# EAGLE board BOB_O1000-W42Y2010 (EAGLE 5.10)
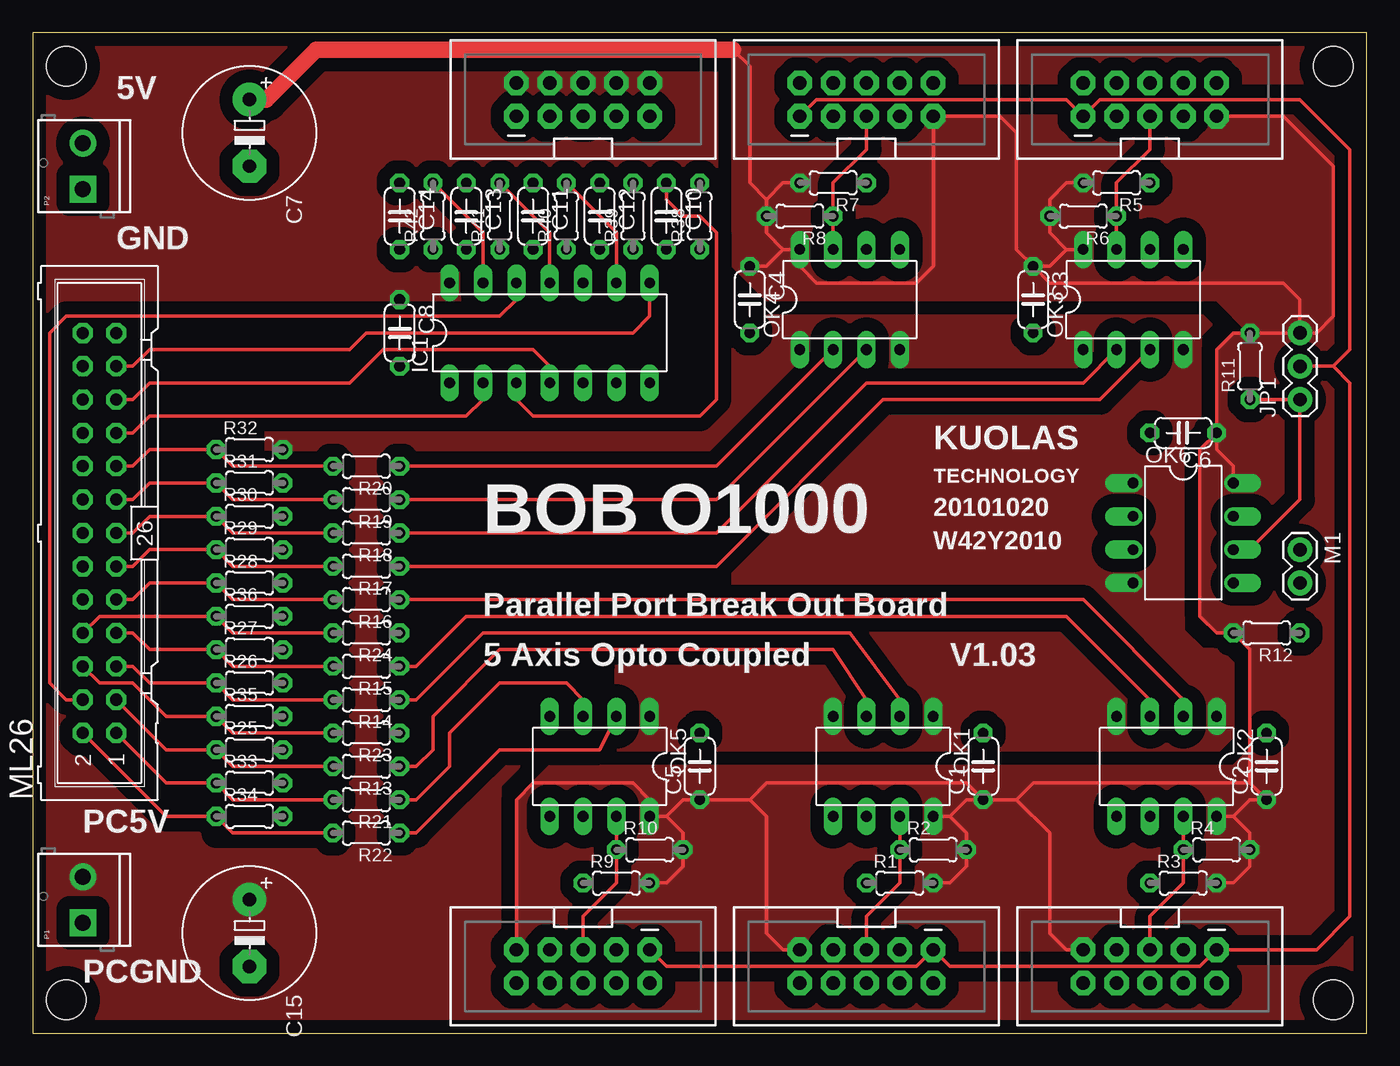
[diagram p0: board, top side]
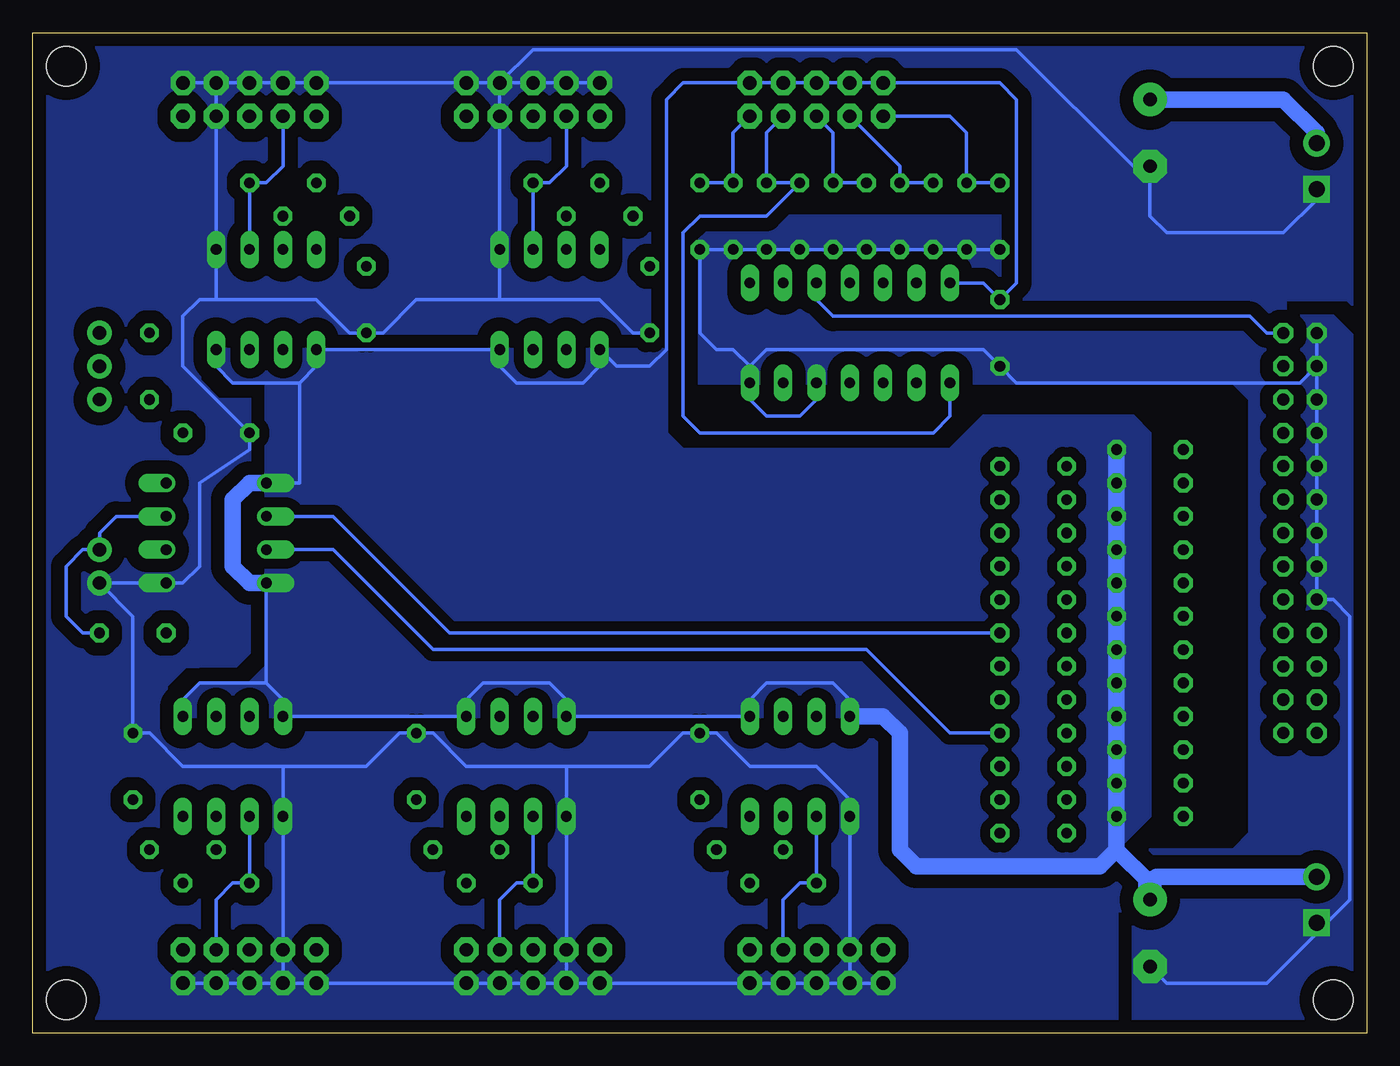
[diagram p1: board, bottom side, seen from below]

Size 101.6 x 76.2 mm. Coordinates in mm from the lower left corner, seen from the top.
Outline: 0,0 101.6,0 101.6,76.2 0,76.19 0,0
Copper layers (1*16): Top 0.035mm / dielectric 1.5mm / Bottom 0.035mm
Design rules "SparkFun": minimum track width 8mil, minimum drill 20mil, track to track 8mil, track to pad 8mil, pad to pad 8mil, via to via 8mil, smd to smd 8mil, copper to edge 10mil, drill to drill 8mil, minimum pad ring 12mil, minimum via ring 10mil, stop-mask expansion 4mil, vias tented up to drill 25mil, thermal gap 10mil
Holes 3.05 mm at 2.54,73.66 99.06,73.66 99.06,2.54 2.54,2.54
tRestrict: area 14,15.2 to 19.1,43.2; area 15.2,44.5 to 16.5,45.7; area 33,47 to 38.1,48.3; area 33,20.3 to 40.6,26.7; area 41.9,21.6 to 43.2,27.9; area 29.2,33 to 52.1,35.6

## Footprints (pad centres in the part's own frame; a part is rotated, then mirrored left to right if it is on the bottom)
C050-024X044 = drill 0.813 octagon: 1 -2.54,0; 2 2.54,0
E5-10,5 = drill 1.016 pad 2.54 round: + -2.54,0 | drill 1.016 pad 2.54 octagon: - 2.54,0
2X5-SHROUDED = drill 1.016 pad 1.88 octagon: 1 -1.27,5.08; 2 1.27,5.08; 3 -1.27,2.54; 4 1.27,2.54; 5 -1.27,0; 6 1.27,0; 7 -1.27,-2.54; 8 1.27,-2.54; 9 -1.27,-5.08; 10 1.27,-5.08
DIL14 = drill 0.813 long: 1 -7.62,-3.81; 2 -5.08,-3.81; 3 -2.54,-3.81; 4 0,-3.81; 5 2.54,-3.81; 6 5.08,-3.81; 7 7.62,-3.81; 8 7.62,3.81; 9 5.08,3.81; 10 2.54,3.81; 11 0,3.81; 12 -2.54,3.81; 13 -5.08,3.81; 14 -7.62,3.81
1X03 = drill 1.016 pad 1.88 round: 1 -2.54,0; 2 0,0; 3 2.54,0
1X02 = drill 1.016 pad 1.88 round: 1 -1.27,0; 2 1.27,0
ML26 = drill 0.914 octagon: 1 -15.24,-1.27; 2 -15.24,1.27; 3 -12.7,-1.27; 4 -12.7,1.27; 5 -10.16,-1.27; 6 -10.16,1.27; 7 -7.62,-1.27; 8 -7.62,1.27; 9 -5.08,-1.27; 10 -5.08,1.27; 11 -2.54,-1.27; 12 -2.54,1.27; 13 0,-1.27; 14 0,1.27; 15 2.54,-1.27; 16 2.54,1.27; 17 5.08,-1.27; 18 5.08,1.27; 19 7.62,-1.27; 20 7.62,1.27; 21 10.16,-1.27; 22 10.16,1.27; 23 12.7,-1.27; 24 12.7,1.27; 25 15.24,-1.27; 26 15.24,1.27
DIL08 = drill 0.813 long: 1 -3.81,-3.81; 2 -1.27,-3.81; 3 1.27,-3.81; 4 3.81,-3.81; 5 3.81,3.81; 6 1.27,3.81; 7 -1.27,3.81; 8 -3.81,3.81
DIL08' = drill 0.813 offset: 1 -3.81,-3.81; 2 -1.27,-3.81; 3 1.27,-3.81; 4 3.81,-3.81; 5 3.81,3.81; 6 1.27,3.81; 7 -1.27,3.81; 8 -3.81,3.81
SCREWTERMINAL-3.5MM-2 = drill 1.2 pad 2.032 square: 1 -1.753,0 | drill 1.2 pad 2.032 round: 2 1.747,0
0204/5 = drill 0.813 octagon: 1 -2.54,0; 2 2.54,0

## Placement (x,y rotation side)
C1  0.1µF  [C050-024X044]  72.39,20.32 90 top
C2  0.1µF  [C050-024X044]  93.98,20.32 90 top
C3  0.1µF  [C050-024X044]  76.2,55.88 270 top
C4  0.1µF  [C050-024X044]  54.61,55.88 270 top
C5  0.1µF  [C050-024X044]  50.8,20.32 90 top
C6  0.1µF  [C050-024X044]  87.63,45.72 180 top
C7  100µF  [E5-10,5]  16.51,68.58 270 top
C8  0.1µF  [C050-024X044]  27.94,53.34 270 top
C10  0.1µF  [C050-024X044]  48.26,62.23 270 top
C11  0.1µF  [C050-024X044]  38.1,62.23 270 top
C12  0.1µF  [C050-024X044]  43.18,62.23 270 top
C13  0.1µF  [C050-024X044]  33.02,62.23 270 top
C14  0.1µF  [C050-024X044]  27.94,62.23 270 top
C15  100µF  [E5-10,5]  16.51,7.62 270 top
CN1  X-AXIS  [2X5-SHROUDED]  63.5,5.08 270 top
CN2  Y-AXIS  [2X5-SHROUDED]  85.09,5.08 270 top
CN3  Z-AXIS  [2X5-SHROUDED]  85.09,71.12 90 top
CN4  A-AXIS  [2X5-SHROUDED]  63.5,71.12 90 top
CN5  B-AXIS  [2X5-SHROUDED]  41.91,5.08 270 top
CN6  HOME  [2X5-SHROUDED]  41.91,71.12 90 top
IC1  74HC14N  [DIL14]  39.37,53.34 0 top
JP1  J1  [1X03]  96.52,50.8 90 top
M1  PWM  [1X02]  96.52,35.56 270 top
ML26  IDC26M  [ML26]  5.08,38.1 90 top
OK1  HCPL2630  [DIL08]  64.77,20.32 180 top
OK2  HCPL2630  [DIL08]  86.36,20.32 180 top
OK3  HCPL2630  [DIL08]  83.82,55.88 0 top
OK4  HCPL2630  [DIL08]  62.23,55.88 0 top
OK5  HCPL2630  [DIL08]  43.18,20.32 180 top
OK6  HCPL2630  [DIL08']  87.63,38.1 270 top
P1  PC5V  [SCREWTERMINAL-3.5MM-2]  3.81,10.16 90 top
P2  EXT5V  [SCREWTERMINAL-3.5MM-2]  3.81,66.04 90 top
R1  330R  [0204/5]  66.04,11.43 0 top
R2  330R  [0204/5]  68.58,13.97 0 top
R3  330R  [0204/5]  87.63,11.43 0 top
R4  330R  [0204/5]  90.17,13.97 0 top
R5  330R  [0204/5]  82.55,64.77 180 top
R6  330R  [0204/5]  80.01,62.23 180 top
R7  330R  [0204/5]  60.96,64.77 180 top
R8  330R  [0204/5]  58.42,62.23 180 top
R9  330R  [0204/5]  44.45,11.43 0 top
R10  330R  [0204/5]  46.99,13.97 0 top
R11  330R  [0204/5]  92.71,50.8 90 top
R12  330R  [0204/5]  93.98,30.48 180 top
R13  470R  [0204/5]  25.4,20.32 180 top
R14  470R  [0204/5]  25.4,25.4 180 top
R15  470R  [0204/5]  25.4,27.94 180 top
R16  470R  [0204/5]  25.4,33.02 180 top
R17  470R  [0204/5]  25.4,35.56 180 top
R18  470R  [0204/5]  25.4,38.1 180 top
R19  470R  [0204/5]  25.4,40.64 180 top
R20  470R  [0204/5]  25.4,43.18 180 top
R21  470R  [0204/5]  25.4,17.78 180 top
R22  470R  [0204/5]  25.4,15.24 180 top
R23  470R  [0204/5]  25.4,22.86 180 top
R24  470R  [0204/5]  25.4,30.48 180 top
R25  2K2  [0204/5]  16.51,21.59 0 top
R26  2K2  [0204/5]  16.51,26.67 0 top
R27  2K2  [0204/5]  16.51,29.21 0 top
R28  2K2  [0204/5]  16.51,34.29 0 top
R29  2K2  [0204/5]  16.51,36.83 0 top
R30  2K2  [0204/5]  16.51,39.37 0 top
R31  2K2  [0204/5]  16.51,41.91 0 top
R32  2K2  [0204/5]  16.51,44.45 0 top
R33  2K2  [0204/5]  16.51,19.05 0 top
R34  2K2  [0204/5]  16.51,16.51 0 top
R35  2K2  [0204/5]  16.51,24.13 0 top
R36  2K2  [0204/5]  16.51,31.75 0 top
R38  10K  [0204/5]  50.8,62.23 90 top
R39  10K  [0204/5]  45.72,62.23 90 top
R40  10K  [0204/5]  40.64,62.23 90 top
R41  10K  [0204/5]  35.56,62.23 90 top
R42  10K  [0204/5]  30.48,62.23 90 top
U$23  CC-NC-BCNIX  [CC-NC-B_NIX]  0,0 0 top

## Library data of the parts
C1-C8 C10-C15 R1-R36 R38-R42 = rcl-2
CN1-CN6 JP1 M1 P1 P2 = SparkFun
IC1 = 74xx-eu
ML26 = con-harting-ml
OK1-OK5 = optocoupler-2
OK6 = optocoupler
U$23 = cc-by-nc-sa

## Nets
5V: C1.1 C2.1 C3.1 C4.1 C5.1 C6.1 C7.+ CN1.9 CN2.9 CN3.9 CN4.9 CN5.9 JP1.3 OK1.8 OK2.8 OK3.8 OK4.8 OK5.8 OK6.8 P2.2 R1.2 R2.2 R3.2 R4.2 R5.2 R6.2 R7.2 R8.2 R9.2 R10.2 R11.2 R12.2
A-HOME: C12.1 CN6.7 IC1.1 R39.2
B-HOME: C10.1 CN6.9 IC1.3 R38.2
CR0: ML26.1 R21.2 R33.1
CR1: ML26.2 R22.2 R34.1
CR2: ML26.6 R23.2 R35.1
CR3: ML26.8 R24.2 R36.1
DIR_A: CN4.3 OK4.6 R7.1
DIR_B: CN5.3 OK5.6 R9.1
DIR_X: CN1.3 OK1.6 R1.1
DIR_Y: CN2.3 OK2.6 R3.1
DIR_Z: CN3.3 OK3.6 R5.1
DR0: ML26.3 R13.2 R25.1
DR1: ML26.5 R14.2 R26.1
DR2: ML26.7 R15.2 R27.1
DR3: ML26.9 R16.2 R28.1
DR4: ML26.11 R17.2 R29.1
DR5: ML26.13 R18.2 R30.1
DR6: ML26.15 R19.2 R31.1
DR7: ML26.17 R20.2 R32.1
ENABLE: CN1.1 CN2.1 CN3.1 CN4.1 CN5.1 JP1.2
GND: C1.2 C2.2 C3.2 C4.2 C5.2 C6.2 C7.- CN1.2 CN1.4 CN1.6 CN1.7 CN1.8 CN1.10 CN2.2 CN2.4 CN2.6 CN2.7 CN2.8 CN2.10 CN3.2 CN3.4 CN3.6 CN3.7 CN3.8 CN3.10 CN4.2 CN4.4 CN4.6 CN4.7 CN4.8 CN4.10 CN5.2 CN5.4 CN5.6 CN5.7 CN5.8 CN5.10 M1.2 OK1.5 OK2.5 OK3.5 OK4.5 OK5.5 OK6.5 P2.1
N$1: OK6.2 R24.1
N$2: JP1.1 OK6.6 R11.1
N$3: M1.1 OK6.7 R12.1
N$4: OK6.3 R23.1
N$5: OK1.2 R14.1
N$6: OK1.3 R13.1
N$17: OK2.3 R15.1
N$18: OK2.2 R16.1
N$19: OK3.3 R17.1
N$20: OK3.2 R18.1
N$21: OK4.3 R19.1
N$22: OK4.2 R20.1
N$23: OK5.3 R21.1
N$24: OK5.2 R22.1
PC5V: C8.1 C15.+ CN6.2 CN6.4 CN6.6 CN6.8 CN6.10 IC1.14 OK1.1 OK1.4 OK2.1 OK2.4 OK3.1 OK3.4 OK4.1 OK4.4 OK5.1 OK5.4 OK6.1 OK6.4 P1.2 R25.2 R26.2 R27.2 R28.2 R29.2 R30.2 R31.2 R32.2 R33.2 R34.2 R35.2 R36.2
PCGND: C8.2 C10.2 C11.2 C12.2 C13.2 C14.2 C15.- IC1.5 IC1.7 ML26.10 ML26.12 ML26.14 ML26.16 ML26.18 ML26.20 ML26.22 ML26.24 ML26.26 P1.1 R38.1 R39.1 R40.1 R41.1 R42.1
SR3: IC1.12 ML26.4
SR4: IC1.10 ML26.25
SR5: IC1.8 ML26.23
SR6: IC1.2 ML26.19
SR7: IC1.4 ML26.21
STEP_A: CN4.5 OK4.7 R8.1
STEP_B: CN5.5 OK5.7 R10.1
STEP_X: CN1.5 OK1.7 R2.1
STEP_Y: CN2.5 OK2.7 R4.1
STEP_Z: CN3.5 OK3.7 R6.1
UNUSED: IC1.6
X-HOME: C14.1 CN6.1 IC1.13 R42.2
Y-HOME: C13.1 CN6.3 IC1.11 R41.2
Z-HOME: C11.1 CN6.5 IC1.9 R40.2

## Tracks (layer width: path | path; a pad name or v marks a point on that pad's centre or on a via)
5V
  Top 0.254: 48.26,16.51 OK5.8 46.99,17.78 45.72,19.05 38.1,19.05 36.83,17.78 CN5.9 | 48.26,16.51 49.53,15.24 R10.2 49.53,12.7 48.26,11.43 R9.2 | 48.26,16.51 49.53,17.78 C5.1 54.61,17.78 | CN1.9 57.15,6.35 55.88,7.62 55.88,16.51 54.61,17.78 | CN2.9 78.74,6.35 77.47,7.62 77.47,15.24 74.93,17.78 | C1.1 74.93,17.78 | 69.85,16.51 OK1.8 | 69.85,16.51 71.12,15.24 R2.2 71.12,12.7 69.85,11.43 R1.2 | C1.1 71.12,17.78 69.85,16.51 | 54.61,17.78 55.88,19.05 71.12,19.05 C1.1 | 74.93,17.78 76.2,19.05 92.71,19.05 | 92.71,19.05 C2.1 92.71,17.78 91.44,16.51 | R3.2 91.44,11.43 92.71,12.7 R4.2 92.71,15.24 91.44,16.51 | 91.44,16.51 OK2.8 | C6.1 90.17,44.45 91.44,43.18 OK6.8 | C6.1 88.9,44.45 88.9,31.75 90.17,30.48 R12.2 92.71,29.21 92.71,19.05 | C6.1 90.17,52.07 91.44,53.34 R11.2 JP1.3 | R5.2 78.74,64.77 77.47,63.5 R6.2 77.47,60.96 78.74,59.69 | 78.74,59.69 OK3.8 | 78.74,59.69 77.47,58.42 C3.1 | C3.1 77.47,57.15 95.25,57.15 96.52,55.88 JP1.3 | 57.15,59.69 OK4.8 58.42,58.42 59.69,57.15 67.31,57.15 68.58,58.42 CN4.9 73.66,69.85 74.93,68.58 74.93,59.69 C3.1 | 57.15,59.69 55.88,60.96 R8.2 55.88,63.5 | 55.88,63.5 57.15,64.77 R7.2 | C4.1 55.88,58.42 57.15,59.69 | CN3.9 95.25,69.85 99.06,66.04 99.06,54.61 97.79,53.34 JP1.3 | 53.34,74.93 54.61,73.66 54.61,64.77 55.88,63.5
  Top 1.27: C7.+ 17.78,71.12 21.59,74.93 53.34,74.93
  Bottom 1.27: C7.+ 6.35,71.12 3.81,68.58 P2.2
  pour Top (isolate 1.016, no thermals): 36.83,5.08 101.6,5.08 101.6,21.59 92.71,21.59 91.44,20.32 39.37,20.32 36.83,17.78
  pour Top (isolate 1.016, no thermals): 92.71,19.05 101.6,19.05 101.6,53.34 92.71,53.34 91.44,53.34 90.17,52.07 90.17,45.72 88.9,44.45 88.9,31.75 90.17,30.48 91.44,30.48 92.71,29.21
  pour Top (isolate 1.016, no thermals): 101.6,76.2 53.34,76.2 53.34,58.42 55.88,55.88 90.17,55.88 92.71,53.34 101.6,53.34
A-HOME
  Bottom 0.254: CN6.7 45.72,68.58 R39.2 C12.1 45.72,62.23 50.8,62.23 52.07,60.96 52.07,46.99 50.8,45.72 33.02,45.72 31.75,46.99 IC1.1
B-HOME
  Top 0.254: C10.1 48.26,63.5 49.53,62.23 50.8,62.23 52.07,60.96 52.07,48.26 50.8,46.99 38.1,46.99 36.83,48.26 IC1.3
  Bottom 0.254: R38.2 C10.1 48.26,68.58 CN6.9
CR0
  Top 0.254: R21.2 15.24,17.78 R33.1 10.16,19.05 ML26.1
CR1
  Top 0.254: R22.2 15.24,15.24 R34.1 10.16,16.51 ML26.2
CR2
  Top 0.254: R23.2 15.24,22.86 R35.1 10.16,24.13 7.62,26.67 5.08,26.67 ML26.6
CR3
  Top 0.254: R24.2 15.24,30.48 R36.1 5.08,31.75 ML26.8
DIR_A
  Bottom 0.254: OK4.6 R7.1 62.23,64.77 60.96,66.04 CN4.3
DIR_B
  Bottom 0.254: CN5.3 44.45,10.16 43.18,11.43 R9.1 OK5.6
DIR_X
  Bottom 0.254: CN1.3 66.04,10.16 64.77,11.43 R1.1 OK1.6
DIR_Y
  Bottom 0.254: OK2.6 R3.1 86.36,11.43 87.63,10.16 CN2.3
DIR_Z
  Bottom 0.254: OK3.6 R5.1 83.82,64.77 82.55,66.04 CN3.3
DR0
  Top 0.254: R13.2 15.24,20.32 R25.1 10.16,21.59 ML26.3
DR1
  Top 0.254: R14.2 15.24,25.4 R26.1 8.89,26.67 7.62,27.94 ML26.5
DR2
  Top 0.254: R15.2 15.24,27.94 R27.1 8.89,29.21 7.62,30.48 ML26.7
DR3
  Top 0.254: R16.2 15.24,33.02 R28.1 8.89,34.29 7.62,33.02 ML26.9
DR4
  Top 0.254: R17.2 15.24,35.56 R29.1 8.89,36.83 7.62,35.56 ML26.11
DR5
  Top 0.254: R18.2 15.24,38.1 R30.1 8.89,39.37 7.62,38.1 ML26.13
DR6
  Top 0.254: R19.2 15.24,40.64 R31.1 8.89,41.91 7.62,40.64 ML26.15
DR7
  Top 0.254: R20.2 15.24,43.18 R32.1 8.89,44.45 7.62,43.18 ML26.17
ENABLE
  Top 0.254: CN5.1 48.26,5.08 67.31,5.08 CN1.1 69.85,5.08 88.9,5.08 CN2.1 97.79,6.35 100.33,8.89 100.33,49.53 99.06,50.8 | 99.06,50.8 JP1.2 | 99.06,50.8 100.33,52.07 100.33,67.31 96.52,71.12 81.28,71.12 CN3.1 78.74,71.12 59.69,71.12 CN4.1
GND
  Bottom 0.254: CN5.10 CN5.8 | CN5.8 CN5.7 OK5.5 39.37,17.78 41.91,20.32 46.99,20.32 49.53,22.86 C5.2 52.07,22.86 54.61,20.32 60.96,20.32 | CN5.8 CN5.6 CN5.4 CN5.2 CN1.10 CN1.8 | CN1.8 CN1.6 CN1.4 CN1.2 CN2.10 CN2.8 | CN2.8 CN2.6 CN2.4 CN2.2 | CN1.8 CN1.7 OK1.5 60.96,20.32 | CN2.8 CN2.7 OK2.5 82.55,20.32 | 60.96,20.32 68.58,20.32 71.12,22.86 C1.2 73.66,22.86 76.2,20.32 82.55,20.32 | 82.55,20.32 90.17,20.32 92.71,22.86 C2.2 93.98,31.75 M1.2 OK6.5 90.17,34.29 88.9,35.56 88.9,41.91 85.09,44.45 C6.2 90.17,50.8 90.17,54.61 88.9,55.88 87.63,55.88 | 87.63,55.88 80.01,55.88 77.47,53.34 C3.2 74.93,53.34 72.39,55.88 66.04,55.88 | CN3.8 CN3.10 | CN3.8 CN3.6 CN3.4 CN3.2 CN4.10 CN4.8 | CN4.8 CN4.6 CN4.4 CN4.2 | CN4.8 CN4.7 OK4.5 66.04,55.88 | CN3.8 CN3.7 OK3.5 87.63,55.88 | 66.04,55.88 58.42,55.88 55.88,53.34 C4.2 | P2.1 3.81,63.5 6.35,60.96 15.24,60.96 16.51,62.23 C7.- 17.78,66.04 26.67,74.93 63.5,74.93 CN4.8
  pour Bottom (isolate 1.016, rank 2, no thermals): 0,0 101.6,0 101.6,76.2 0,76.2
N$1
  Bottom 0.254: R24.1 69.85,30.48 78.74,39.37 OK6.2
N$2
  Top 0.254: OK6.6 92.71,36.83 96.52,40.64 JP1.1 R11.1
N$3
  Bottom 0.254: OK6.7 95.25,39.37 96.52,38.1 M1.1 97.79,36.83 99.06,35.56 99.06,31.75 97.79,30.48 R12.1
N$4
  Bottom 0.254: OK6.3 78.74,36.83 71.12,29.21 38.1,29.21 31.75,22.86 R23.1
N$5
  Top 0.254: OK1.2 66.04,25.4 62.23,30.48 34.29,30.48 29.21,25.4 R14.1
N$6
  Top 0.254: R13.1 29.21,20.32 30.48,21.59 30.48,24.13 35.56,29.21 60.96,29.21 63.5,25.4 OK1.3
N$17
  Top 0.254: OK2.3 85.09,25.4 78.74,31.75 33.02,31.75 29.21,27.94 R15.1
N$18
  Top 0.254: OK2.2 87.63,25.4 80.01,33.02 R16.1
N$19
  Top 0.254: R17.1 52.07,35.56 64.77,48.26 81.28,48.26 OK3.3
N$20
  Top 0.254: R18.1 52.07,38.1 63.5,49.53 80.01,49.53 OK3.2
N$21
  Top 0.254: R19.1 52.07,40.64 OK4.3
N$22
  Top 0.254: R20.1 52.07,43.18 OK4.2
N$23
  Top 0.254: R21.1 29.21,17.78 31.75,20.32 31.75,22.86 35.56,26.67 40.64,26.67 41.91,25.4 OK5.3
N$24
  Top 0.254: R22.1 29.21,15.24 35.56,21.59 43.18,21.59 OK5.2
PC5V
  Bottom 0.254: OK5.4 39.37,25.4 40.64,26.67 45.72,26.67 46.99,25.4 OK5.1 OK1.4 60.96,25.4 62.23,26.67 67.31,26.67 68.58,25.4 OK1.1 OK2.4 82.55,25.4 83.82,26.67 | OK2.1 90.17,25.4 88.9,26.67 83.82,26.67 | 83.82,26.67 OK6.4 | OK6.1 81.28,41.91 81.28,49.53 | OK3.4 87.63,50.8 86.36,49.53 81.28,49.53 | 81.28,49.53 80.01,50.8 OK3.1 OK4.4 66.04,50.8 64.77,49.53 59.69,49.53 58.42,50.8 OK4.1 57.15,50.8 54.61,50.8 53.34,52.07 53.34,71.12 52.07,72.39 CN6.10 CN6.8 CN6.6 CN6.4 CN6.2 27.94,72.39 26.67,71.12 26.67,57.15 C8.1 29.21,57.15 IC1.14 | 16.03,11.91 16.51,11.43
  Bottom 1.27: R32.2 R31.2 R30.2 R29.2 R28.2 R36.2 R27.2 R26.2 R35.2 R25.2 R33.2 R34.2 19.05,13.97 | OK5.4 36.83,24.13 35.56,22.86 35.56,13.97 34.29,12.7 20.32,12.7 19.05,13.97 | OK6.4 85.09,34.29 86.36,35.56 86.36,40.64 85.09,41.91 OK6.1 | P1.2 16.03,11.91 | 16.51,11.43 19.05,13.97
  Bottom 1.778: 16.51,11.43 C15.+
  pour Bottom (isolate 0.762, no thermals): 36.83,24.13 90.17,24.13 90.17,25.4 88.9,26.67 85.09,26.67 83.82,27.94 83.82,49.53 86.36,49.53 87.63,50.8 87.63,52.07 53.34,52.07 53.34,45.72 52.07,44.45 31.75,44.45 29.21,46.99 17.78,46.99 16.51,45.72 16.51,16.51 20.32,12.7 34.29,12.7 35.56,13.97 35.56,22.86
  pour Top (isolate 1.016, rank 2, no thermals): 0,0 101.6,0 101.6,76.2 0,76.2
PCGND
  Bottom 0.254: ML26.24 ML26.26 | ML26.24 ML26.22 ML26.20 ML26.18 ML26.16 ML26.14 ML26.12 ML26.10 2.54,33.02 1.27,31.75 1.27,10.16 3.02,8.41 P1.1 3.81,7.62 7.62,3.81 15.24,3.81 C15.- | C14.2 R42.1 C13.2 R41.1 C11.2 R40.1 C12.2 R39.1 C10.2 R38.1 50.8,53.34 49.53,52.07 48.26,52.07 46.99,50.8 | IC1.5 41.91,48.26 43.18,46.99 45.72,46.99 46.99,48.26 IC1.7 46.99,50.8 | 46.99,50.8 45.72,52.07 29.21,52.07 C8.2 26.67,49.53 5.08,49.53 ML26.24
  pour Bottom (isolate 1.016, no thermals): 0,0 17.78,0 17.78,12.7 16.51,13.97 10.16,13.97 8.89,15.24 8.89,48.26 10.16,49.53 52.07,49.53 52.07,60.96 50.8,62.23 26.67,62.23 25.4,60.96 25.4,55.88 24.13,54.61 2.54,54.61 0,52.07
SR3
  Top 0.254: IC1.12 36.83,55.88 35.56,54.61 2.54,54.61 1.27,53.34 1.27,26.67 2.54,25.4 ML26.4
SR4
  Bottom 0.254: IC1.10 41.91,55.88 40.64,54.61 8.89,54.61 7.62,53.34 ML26.25
SR5
  Top 0.254: IC1.8 46.99,54.61 45.72,53.34 25.4,53.34 24.13,52.07 8.89,52.07 7.62,50.8 ML26.23
SR6
  Top 0.254: ML26.19 7.62,45.72 8.89,46.99 33.02,46.99 34.29,48.26 IC1.2
SR7
  Top 0.254: IC1.4 39.37,50.8 38.1,52.07 26.67,52.07 24.13,49.53 8.89,49.53 7.62,48.26 ML26.21
STEP_A
  Top 0.254: OK4.7 R8.1 60.96,64.77 63.5,67.31 CN4.5
STEP_B
  Top 0.254: CN5.5 41.91,8.89 44.45,11.43 R10.1 OK5.7
STEP_X
  Top 0.254: CN1.5 63.5,8.89 66.04,11.43 R2.1 OK1.7
STEP_Y
  Top 0.254: CN2.5 85.09,8.89 87.63,11.43 R4.1 OK2.7
STEP_Z
  Top 0.254: OK3.7 R6.1 82.55,64.77 85.09,67.31 CN3.5
X-HOME
  Top 0.254: IC1.13 34.29,60.96 R42.2
  Bottom 0.254: C14.1 R42.2 30.48,68.58 31.75,69.85 CN6.1
Y-HOME
  Top 0.254: IC1.11 39.37,60.96 R41.2
  Bottom 0.254: C13.1 R41.2 35.56,66.04 CN6.3
Z-HOME
  Top 0.254: IC1.9 44.45,60.96 R40.2
  Bottom 0.254: C11.1 R40.2 40.64,68.58 CN6.5

## Text on the board
tPlace: 5V | GND | KUOLAS | TECHNOLOGY | 20101020 | BOB O1000 | W42Y2010 | Parallel Port Break Out Board | 5 Axis Opto Coupled | V1.03 | PC5V | PCGND